# Altium PCB AT32.PcbDoc (part 4 of 9)
Units mm, origin at the board's own origin, x right, y up, seen from the top; angles counter-clockwise.
Board outline 152.1 x 84.6 mm, 2 copper layers (Top Layer, Bottom Layer); 49 components, 58 nets, 223 pads, 0 vias.
Unrouted connection lines stored in the file: 3.
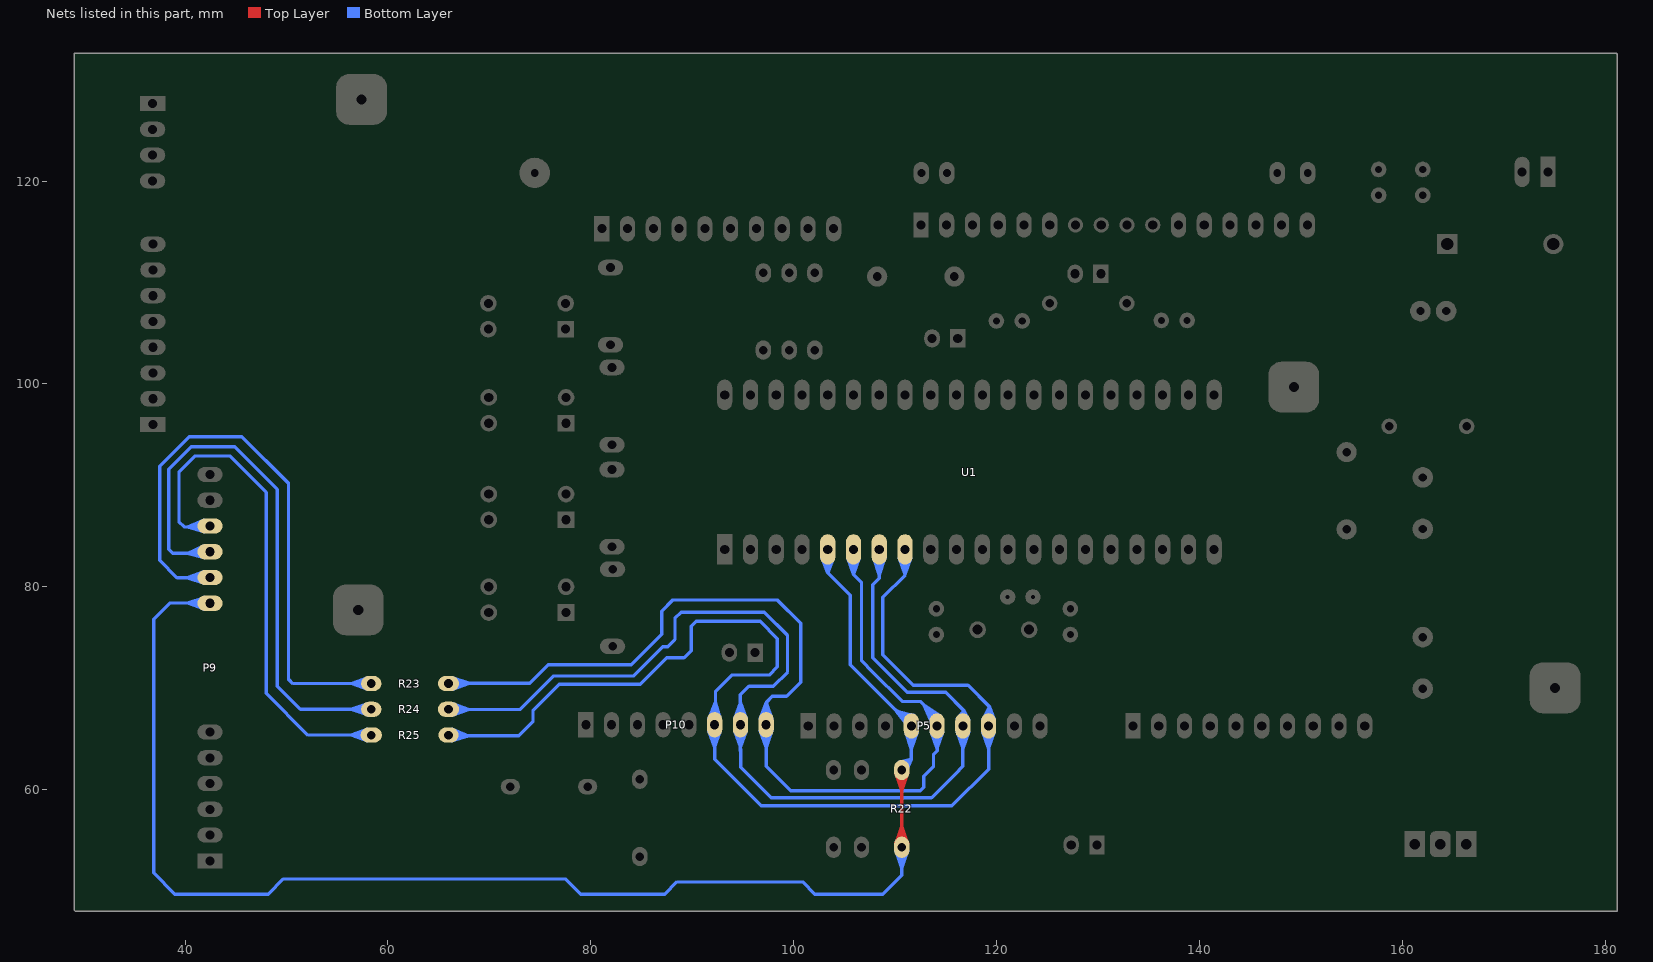
[diagram p4: the nets of this part, all layers, seen from the top]

## Nets (pads, with @x,y where several pads share a name; then routed paths per layer and width w, separated by ;. In a path a pad name is that pad's centre, name@x,y a point inside that pad or via, vN(x,y) a via of type N, cw(c..) or ccw(c..) an arc to the next point about the centre after c; other vN are vias at no path point) (continued)
NetP5_5: P5.5 P9.11 R22.1 R22.2 U1.5 | length 627
  Top Layer w0.33: R22.1@110.246,55.032 ccw(c109.248,56.03) 110.66,56.03 ccw(c112.072,56.03) R22.1@111.074,55.032 ; R22.2@110.246,61.274 cw(c109.248,60.276) 110.66,60.276 cw(c112.072,60.276) R22.2@111.074,61.274 ; R22.1@110.66,54.26 R22.1@110.66,54.318 R22.2@110.66,61.938 ; R22.1@110.083,54.716 110.66,56.358 ; R22.1@110.083,54.716 110.66,56.358 ; R22.1@110.083,54.716 110.66,56.358 ; R22.1@110.083,54.716 110.66,56.358 ; R22.1@110.083,54.716 110.66,56.358 ; R22.1@110.083,54.716 110.66,56.358 ; R22.1@110.083,54.716 110.66,56.358 ; R22.2@110.083,61.59 110.66,59.948 ; R22.2@110.083,61.59 110.66,59.948 ; R22.2@110.083,61.59 110.66,59.948 ; R22.2@110.083,61.59 110.66,59.948 ; R22.2@110.083,61.59 110.66,59.948 ; R22.2@110.083,61.59 110.66,59.948 ; R22.2@110.083,61.59 110.66,59.948 ; R22.1@110.406,54.637 110.66,56.358 ; R22.1@110.406,54.637 110.66,56.358 ; R22.1@110.406,54.637 110.66,56.358 ; R22.1@110.406,54.637 110.66,56.358 ; R22.1@110.406,54.637 110.66,56.358 ; R22.1@110.406,54.637 110.66,56.358 ; R22.1@110.406,54.637 110.66,56.358 ; R22.2@110.406,61.669 110.66,59.948 ; R22.2@110.406,61.669 110.66,59.948 ; R22.2@110.406,61.669 110.66,59.948 ; R22.2@110.406,61.669 110.66,59.948 ; R22.2@110.406,61.669 110.66,59.948 ; R22.2@110.406,61.669 110.66,59.948 ; R22.2@110.406,61.669 110.66,59.948 ; R22.1@110.66,54.618 110.66,56.358 ; R22.1@110.66,54.618 110.66,56.358 ; R22.1@110.66,54.618 110.66,56.358 ; R22.1@110.66,54.618 110.66,56.358 ; R22.1@110.66,54.618 110.66,56.358 ; R22.1@110.66,54.618 110.66,56.358 ; R22.1@110.66,54.618 110.66,56.358 ; 110.66,56.358 R22.1@111.237,54.716 ; 110.66,56.358 R22.1@110.914,54.637 ; 110.66,56.358 R22.1@111.237,54.716 ; 110.66,56.358 R22.1@110.914,54.637 ; 110.66,56.358 R22.1@111.237,54.716 ; 110.66,56.358 R22.1@110.914,54.637 ; 110.66,56.358 R22.1@111.237,54.716 ; 110.66,56.358 R22.1@110.914,54.637 ; 110.66,56.358 R22.1@111.237,54.716 ; 110.66,56.358 R22.1@110.914,54.637 ; 110.66,56.358 R22.1@111.237,54.716 ; 110.66,56.358 R22.1@110.914,54.637 ; 110.66,56.358 R22.1@111.237,54.716 ; 110.66,56.358 R22.1@110.914,54.637 ; 110.66,59.948 R22.2@111.237,61.59 ; 110.66,59.948 R22.2@110.914,61.669 ; 110.66,59.948 R22.2@110.66,61.688 ; 110.66,59.948 R22.2@111.237,61.59 ; 110.66,59.948 R22.2@110.914,61.669 ; 110.66,59.948 R22.2@110.66,61.688 ; 110.66,59.948 R22.2@111.237,61.59 ; 110.66,59.948 R22.2@110.914,61.669 ; 110.66,59.948 R22.2@110.66,61.688 ; 110.66,59.948 R22.2@111.237,61.59 ; 110.66,59.948 R22.2@110.914,61.669 ; 110.66,59.948 R22.2@110.66,61.688 ; 110.66,59.948 R22.2@111.237,61.59 ; 110.66,59.948 R22.2@110.914,61.669 ; 110.66,59.948 R22.2@110.66,61.688 ; 110.66,59.948 R22.2@111.237,61.59 ; 110.66,59.948 R22.2@110.914,61.669 ; 110.66,59.948 R22.2@110.66,61.688 ; 110.66,59.948 R22.2@111.237,61.59 ; 110.66,59.948 R22.2@110.914,61.669 ; 110.66,59.948 R22.2@110.66,61.688
  Bottom Layer w0.33: 40.499,78.4 cw(c40.499,76.919) P9.11@41.546,77.966 ; 40.596,78.4 ccw(c40.596,79.744) P9.11@41.546,78.794 ; P9.11@42.5,78.4 38.5,78.4 36.9,76.8 36.9,51.8 39,49.7 48.2,49.7 49.7,51.2 77.5,51.2 79,49.7 87.3,49.7 88.5,50.9 100.9,50.9 102.1,49.7 108.8,49.7 110.66,51.56 R22.1@110.66,54.318 ; U1.5@102.952,82.523 cw(c101.954,81.525) 103.366,81.525 cw(c104.778,81.525) U1.5@103.78,82.523 ; U1.5@103.366,83.687 103.366,81.399 ; 109.754,68.138 ccw(c111.606,69.99) P5.5@111.606,67.371 ; R22.1@110.246,53.604 cw(c109.248,52.606) 110.66,52.606 cw(c112.072,52.606) R22.1@111.074,53.604 ; 110.317,67.575 ccw(c111.606,68.864) P5.5@111.606,67.041 ; R22.2@110.6,62 111.606,63.006 ; R22.2@110.78,62.76 ccw(c110.967,63.645) 111.606,63.006 ; 110.88,67.012 ccw(c111.606,67.737) P5.5@111.606,66.711 ; P5.5@111.192,65.372 cw(c110.194,64.374) 111.606,64.374 cw(c113.018,64.374) P5.5@112.02,65.372 ; R22.2@111.245,62.188 cw(c112.348,62.188) 111.568,62.968 ; 40.22,78.4 P9.11@41.855,77.804 ; 40.22,78.4 P9.11@41.868,78.958 ; 40.22,78.4 P9.11@41.938,78.126 ; 40.22,78.4 P9.11@41.944,78.635 ; 40.22,78.4 P9.11@41.96,78.38 ; 40.22,78.4 P9.11@41.855,77.804 ; 40.22,78.4 P9.11@41.868,78.958 ; 40.22,78.4 P9.11@41.938,78.126 ; 40.22,78.4 P9.11@41.944,78.635 ; 40.22,78.4 P9.11@41.96,78.38 ; 40.22,78.4 P9.11@41.855,77.804 ; 40.22,78.4 P9.11@41.868,78.958 ; 40.22,78.4 P9.11@41.938,78.126 ; 40.22,78.4 P9.11@41.944,78.635 ; 40.22,78.4 P9.11@41.96,78.38 ; 40.22,78.4 P9.11@41.855,77.804 ; 40.22,78.4 P9.11@41.868,78.958 ; 40.22,78.4 P9.11@41.938,78.126 ; 40.22,78.4 P9.11@41.944,78.635 ; 40.22,78.4 P9.11@41.96,78.38 ; 40.22,78.4 P9.11@41.855,77.804 ; 40.22,78.4 P9.11@41.868,78.958 ; 40.22,78.4 P9.11@41.938,78.126 ; 40.22,78.4 P9.11@41.944,78.635 ; 40.22,78.4 P9.11@41.96,78.38 ; 40.22,78.4 P9.11@41.855,77.804 ; 40.22,78.4 P9.11@41.868,78.958 ; 40.22,78.4 P9.11@41.938,78.126 ; 40.22,78.4 P9.11@41.944,78.635 ; 40.22,78.4 P9.11@41.96,78.38 ; 40.22,78.4 P9.11@41.855,77.804 ; 40.22,78.4 P9.11@41.868,78.958 ; 40.22,78.4 P9.11@41.938,78.126 ; 40.22,78.4 P9.11@41.944,78.635 ; 40.22,78.4 P9.11@41.96,78.38 ; U1.5@102.792,82.826 103.366,81.399 ; U1.5@102.792,82.826 103.366,81.399 ; U1.5@102.792,82.826 103.366,81.399 ; U1.5@102.792,82.826 103.366,81.399 ; U1.5@102.792,82.826 103.366,81.399 ; U1.5@102.792,82.826 103.366,81.399 ; U1.5@102.792,82.826 103.366,81.399 ; U1.5@103.112,82.916 103.366,81.399 ; U1.5@103.112,82.916 103.366,81.399 ; U1.5@103.112,82.916 103.366,81.399 ; U1.5@103.112,82.916 103.366,81.399 ; U1.5@103.112,82.916 103.366,81.399 ; U1.5@103.112,82.916 103.366,81.399 ; U1.5@103.112,82.916 103.366,81.399 ; 103.366,81.399 105.6,79.165 105.6,72.3 107.692,70.208 107.692,70.2 P5.5@111.606,66.286 111.606,63.006 ; 103.366,81.399 U1.5@103.94,82.826 ; 103.366,81.399 U1.5@103.62,82.916 ; 103.366,81.399 U1.5@103.366,82.937 ; 103.366,81.399 U1.5@103.94,82.826 ; 103.366,81.399 U1.5@103.62,82.916 ; 103.366,81.399 U1.5@103.366,82.937 ; 103.366,81.399 U1.5@103.94,82.826 ; 103.366,81.399 U1.5@103.62,82.916 ; 103.366,81.399 U1.5@103.366,82.937 ; 103.366,81.399 U1.5@103.94,82.826 ; 103.366,81.399 U1.5@103.62,82.916 ; 103.366,81.399 U1.5@103.366,82.937 ; 103.366,81.399 U1.5@103.94,82.826 ; 103.366,81.399 U1.5@103.62,82.916 ; 103.366,81.399 U1.5@103.366,82.937 ; 103.366,81.399 U1.5@103.94,82.826 ; 103.366,81.399 U1.5@103.62,82.916 ; 103.366,81.399 U1.5@103.366,82.937 ; 103.366,81.399 U1.5@103.94,82.826 ; 103.366,81.399 U1.5@103.62,82.916 ; 103.366,81.399 U1.5@103.366,82.937 ; R22.1@110.083,53.92 110.66,52.278 ; R22.1@110.083,53.92 110.66,52.278 ; R22.1@110.083,53.92 110.66,52.278 ; R22.1@110.083,53.92 110.66,52.278 ; R22.1@110.083,53.92 110.66,52.278 ; R22.1@110.083,53.92 110.66,52.278 ; R22.1@110.083,53.92 110.66,52.278 ; 110.156,67.736 P5.5@111.207,66.358 ; 110.156,67.736 P5.5@111.839,67.322 ; 110.156,67.736 P5.5@111.451,66.584 ; 110.156,67.736 P5.5@111.73,67.009 ; 110.156,67.736 P5.5@111.606,66.786 ; 110.156,67.736 P5.5@111.207,66.358 ; 110.156,67.736 P5.5@111.839,67.322 ; 110.156,67.736 P5.5@111.451,66.584 ; 110.156,67.736 P5.5@111.73,67.009 ; 110.156,67.736 P5.5@111.606,66.786 ; 110.156,67.736 P5.5@111.207,66.358 ; 110.156,67.736 P5.5@111.839,67.322 ; 110.156,67.736 P5.5@111.451,66.584 ; 110.156,67.736 P5.5@111.73,67.009 ; 110.156,67.736 P5.5@111.606,66.786 ; 110.156,67.736 P5.5@111.207,66.358 ; 110.156,67.736 P5.5@111.839,67.322 ; 110.156,67.736 P5.5@111.451,66.584 ; 110.156,67.736 P5.5@111.73,67.009 ; 110.156,67.736 P5.5@111.606,66.786 ; 110.156,67.736 P5.5@111.207,66.358 ; 110.156,67.736 P5.5@111.839,67.322 ; 110.156,67.736 P5.5@111.451,66.584 ; 110.156,67.736 P5.5@111.73,67.009 ; 110.156,67.736 P5.5@111.606,66.786 ; 110.156,67.736 P5.5@111.207,66.358 ; 110.156,67.736 P5.5@111.839,67.322 ; 110.156,67.736 P5.5@111.451,66.584 ; 110.156,67.736 P5.5@111.73,67.009 ; 110.156,67.736 P5.5@111.606,66.786 ; 110.156,67.736 P5.5@111.207,66.358 ; 110.156,67.736 P5.5@111.839,67.322 ; 110.156,67.736 P5.5@111.451,66.584 ; 110.156,67.736 P5.5@111.73,67.009 ; 110.156,67.736 P5.5@111.606,66.786 ; R22.2@110.391,62.708 111.606,63.006 ; R22.2@110.391,62.708 111.606,63.006 ; R22.2@110.391,62.708 111.606,63.006 ; R22.2@110.391,62.708 111.606,63.006 ; R22.2@110.391,62.708 111.606,63.006 ; R22.2@110.391,62.708 111.606,63.006 ; R22.2@110.391,62.708 111.606,63.006 ; R22.1@110.406,53.999 110.66,52.278 ; R22.1@110.406,53.999 110.66,52.278 ; R22.1@110.406,53.999 110.66,52.278 ; R22.1@110.406,53.999 110.66,52.278 ; R22.1@110.406,53.999 110.66,52.278 ; R22.1@110.406,53.999 110.66,52.278 ; R22.1@110.406,53.999 110.66,52.278 ; R22.2@110.514,62.397 111.606,63.006 ; R22.2@110.514,62.397 111.606,63.006 ; R22.2@110.514,62.397 111.606,63.006 ; R22.2@110.514,62.397 111.606,63.006 ; R22.2@110.514,62.397 111.606,63.006 ; R22.2@110.514,62.397 111.606,63.006 ; R22.2@110.514,62.397 111.606,63.006 ; 110.66,52.278 R22.1@111.237,53.92 ; 110.66,52.278 R22.1@110.914,53.999 ; 110.66,52.278 R22.1@110.66,54.018 ; 110.66,52.278 R22.1@111.237,53.92 ; 110.66,52.278 R22.1@110.914,53.999 ; 110.66,52.278 R22.1@110.66,54.018 ; 110.66,52.278 R22.1@111.237,53.92 ; 110.66,52.278 R22.1@110.914,53.999 ; 110.66,52.278 R22.1@110.66,54.018 ; 110.66,52.278 R22.1@111.237,53.92 ; 110.66,52.278 R22.1@110.914,53.999 ; 110.66,52.278 R22.1@110.66,54.018 ; 110.66,52.278 R22.1@111.237,53.92 ; 110.66,52.278 R22.1@110.914,53.999 ; 110.66,52.278 R22.1@110.66,54.018 ; 110.66,52.278 R22.1@111.237,53.92 ; 110.66,52.278 R22.1@110.914,53.999 ; 110.66,52.278 R22.1@110.66,54.018 ; 110.66,52.278 R22.1@111.237,53.92 ; 110.66,52.278 R22.1@110.914,53.999 ; 110.66,52.278 R22.1@110.66,54.018 ; R22.2@110.66,62.188 111.606,63.006 ; R22.2@110.66,62.188 111.606,63.006 ; R22.2@110.66,62.188 111.606,63.006 ; R22.2@110.66,62.188 111.606,63.006 ; R22.2@110.66,62.188 111.606,63.006 ; R22.2@110.66,62.188 111.606,63.006 ; R22.2@110.66,62.188 111.606,63.006 ; R22.2@110.846,62.013 111.606,63.006 ; R22.2@110.846,62.013 111.606,63.006 ; R22.2@110.846,62.013 111.606,63.006 ; R22.2@110.846,62.013 111.606,63.006 ; R22.2@110.846,62.013 111.606,63.006 ; R22.2@110.846,62.013 111.606,63.006 ; R22.2@110.846,62.013 111.606,63.006 ; P5.5@111.029,65.688 111.606,64.046 ; P5.5@111.029,65.688 111.606,64.046 ; P5.5@111.029,65.688 111.606,64.046 ; P5.5@111.029,65.688 111.606,64.046 ; P5.5@111.029,65.688 111.606,64.046 ; P5.5@111.029,65.688 111.606,64.046 ; P5.5@111.029,65.688 111.606,64.046 ; R22.2@111.135,61.847 111.606,63.006 ; R22.2@111.135,61.847 111.606,63.006 ; R22.2@111.135,61.847 111.606,63.006 ; R22.2@111.135,61.847 111.606,63.006 ; R22.2@111.135,61.847 111.606,63.006 ; R22.2@111.135,61.847 111.606,63.006 ; R22.2@111.135,61.847 111.606,63.006 ; P5.5@111.352,65.767 111.606,64.046 ; P5.5@111.352,65.767 111.606,64.046 ; P5.5@111.352,65.767 111.606,64.046 ; P5.5@111.352,65.767 111.606,64.046 ; P5.5@111.352,65.767 111.606,64.046 ; P5.5@111.352,65.767 111.606,64.046 ; P5.5@111.352,65.767 111.606,64.046 ; 111.606,64.046 P5.5@112.183,65.688 ; 111.606,64.046 P5.5@111.86,65.767 ; 111.606,64.046 P5.5@111.606,65.786 ; 111.606,64.046 P5.5@112.183,65.688 ; 111.606,64.046 P5.5@111.86,65.767 ; 111.606,64.046 P5.5@111.606,65.786 ; 111.606,64.046 P5.5@112.183,65.688 ; 111.606,64.046 P5.5@111.86,65.767 ; 111.606,64.046 P5.5@111.606,65.786 ; 111.606,64.046 P5.5@112.183,65.688 ; 111.606,64.046 P5.5@111.86,65.767 ; 111.606,64.046 P5.5@111.606,65.786 ; 111.606,64.046 P5.5@112.183,65.688 ; 111.606,64.046 P5.5@111.86,65.767 ; 111.606,64.046 P5.5@111.606,65.786 ; 111.606,64.046 P5.5@112.183,65.688 ; 111.606,64.046 P5.5@111.86,65.767 ; 111.606,64.046 P5.5@111.606,65.786 ; 111.606,64.046 P5.5@112.183,65.688 ; 111.606,64.046 P5.5@111.86,65.767 ; 111.606,64.046 P5.5@111.606,65.786
NetP5_6: P5.6 P9.12 P10.8 R23.1 R23.2 U1.6 | length 673.5
  Bottom Layer w0.33: 40.499,80.9 ccw(c40.499,82.381) P9.12@41.546,81.334 ; 40.596,80.9 cw(c40.596,79.556) P9.12@41.546,80.506 ; P9.12@42.4,80.9 39.2,80.9 37.5,82.6 37.5,91.9 40.4,94.8 45.6,94.8 50.2,90.2 50.2,70.9 50.636,70.464 R23.2@58.358,70.464 ; R23.2@57.694,70.05 ccw(c56.696,69.052) 56.696,70.464 ccw(c56.696,71.876) R23.2@57.694,70.878 ; R23.1@66,70.5 74,70.5 75.8,72.3 84,72.3 87,75.3 87,77.6 88.1,78.7 98.4,78.7 100.7,76.4 100.7,70.6 99.3,69.2 97.9,69.2 97.295,68.595 ; R23.1@66.692,70.05 cw(c67.777,68.965) 67.777,70.5 ; R23.1@66.692,70.878 ccw(c67.603,71.789) 67.603,70.5 ; P10.8@96.881,65.492 cw(c95.883,64.494) 97.295,64.494 cw(c98.707,64.494) P10.8@97.709,65.492 ; P10.8@96.881,67.32 ccw(c95.883,68.318) 97.295,68.318 ccw(c98.707,68.318) P10.8@97.709,67.32 ; P10.8@97.295,67.006 P10.8@97.295,66.406 ; U1.6@105.492,82.523 cw(c104.494,81.525) 105.906,81.525 cw(c107.318,81.525) U1.6@106.32,82.523 ; U1.6@105.906,83.687 105.906,81.184 106.7,80.39 106.7,72.7 107.8,71.6 110.7,68.7 112.5,68.7 P5.6@114.2,67 ; 112.958,68.242 cw(c111.502,66.786) P5.6@113.561,66.786 ; 113.521,67.679 cw(c112.629,66.786) P5.6@113.891,66.786 ; 113.605,67.595 ccw(c114.146,68.137) P5.6@114.146,67.371 ; P5.6@113.732,65.372 cw(c112.734,64.374) 114.146,64.374 cw(c115.558,64.374) P5.6@114.56,65.372 ; P5.6@114.146,66.286 114.146,63.846 113.8,63.5 113.8,62.3 112.822,61.322 112.822,60.223 112.5,59.9 99.7,59.9 97.3,62.3 97.3,63.6 97.295,63.605 P10.8@97.295,66.406 ; 40.22,80.9 P9.12@41.868,80.342 ; 40.22,80.9 P9.12@41.855,81.496 ; 40.22,80.9 P9.12@41.944,80.665 ; 40.22,80.9 P9.12@41.938,81.174 ; 40.22,80.9 P9.12@41.96,80.92 ; 40.22,80.9 P9.12@41.868,80.342 ; 40.22,80.9 P9.12@41.855,81.496 ; 40.22,80.9 P9.12@41.944,80.665 ; 40.22,80.9 P9.12@41.938,81.174 ; 40.22,80.9 P9.12@41.96,80.92 ; 40.22,80.9 P9.12@41.868,80.342 ; 40.22,80.9 P9.12@41.855,81.496 ; 40.22,80.9 P9.12@41.944,80.665 ; 40.22,80.9 P9.12@41.938,81.174 ; 40.22,80.9 P9.12@41.96,80.92 ; 40.22,80.9 P9.12@41.868,80.342 ; 40.22,80.9 P9.12@41.855,81.496 ; 40.22,80.9 P9.12@41.944,80.665 ; 40.22,80.9 P9.12@41.938,81.174 ; 40.22,80.9 P9.12@41.96,80.92 ; 40.22,80.9 P9.12@41.868,80.342 ; 40.22,80.9 P9.12@41.855,81.496 ; 40.22,80.9 P9.12@41.944,80.665 ; 40.22,80.9 P9.12@41.938,81.174 ; 40.22,80.9 P9.12@41.96,80.92 ; 40.22,80.9 P9.12@41.868,80.342 ; 40.22,80.9 P9.12@41.855,81.496 ; 40.22,80.9 P9.12@41.944,80.665 ; 40.22,80.9 P9.12@41.938,81.174 ; 40.22,80.9 P9.12@41.96,80.92 ; 40.22,80.9 P9.12@41.868,80.342 ; 40.22,80.9 P9.12@41.855,81.496 ; 40.22,80.9 P9.12@41.944,80.665 ; 40.22,80.9 P9.12@41.938,81.174 ; 40.22,80.9 P9.12@41.96,80.92 ; 56.368,70.464 R23.2@58.01,69.887 ; 56.368,70.464 R23.2@58.01,71.041 ; 56.368,70.464 R23.2@58.089,70.21 ; 56.368,70.464 R23.2@58.089,70.718 ; 56.368,70.464 R23.2@58.108,70.464 ; 56.368,70.464 R23.2@58.01,69.887 ; 56.368,70.464 R23.2@58.01,71.041 ; 56.368,70.464 R23.2@58.089,70.21 ; 56.368,70.464 R23.2@58.089,70.718 ; 56.368,70.464 R23.2@58.108,70.464 ; 56.368,70.464 R23.2@58.01,69.887 ; 56.368,70.464 R23.2@58.01,71.041 ; 56.368,70.464 R23.2@58.089,70.21 ; 56.368,70.464 R23.2@58.089,70.718 ; 56.368,70.464 R23.2@58.108,70.464 ; 56.368,70.464 R23.2@58.01,69.887 ; 56.368,70.464 R23.2@58.01,71.041 ; 56.368,70.464 R23.2@58.089,70.21 ; 56.368,70.464 R23.2@58.089,70.718 ; 56.368,70.464 R23.2@58.108,70.464 ; 56.368,70.464 R23.2@58.01,69.887 ; 56.368,70.464 R23.2@58.01,71.041 ; 56.368,70.464 R23.2@58.089,70.21 ; 56.368,70.464 R23.2@58.089,70.718 ; 56.368,70.464 R23.2@58.108,70.464 ; 56.368,70.464 R23.2@58.01,69.887 ; 56.368,70.464 R23.2@58.01,71.041 ; 56.368,70.464 R23.2@58.089,70.21 ; 56.368,70.464 R23.2@58.089,70.718 ; 56.368,70.464 R23.2@58.108,70.464 ; 56.368,70.464 R23.2@58.01,69.887 ; 56.368,70.464 R23.2@58.01,71.041 ; 56.368,70.464 R23.2@58.089,70.21 ; 56.368,70.464 R23.2@58.089,70.718 ; 56.368,70.464 R23.2@58.108,70.464 ; R23.1@66.278,70.464 68.018,70.5 ; R23.1@66.278,70.464 68.018,70.5 ; R23.1@66.278,70.464 68.018,70.5 ; R23.1@66.278,70.464 68.018,70.5 ; R23.1@66.278,70.464 68.018,70.5 ; R23.1@66.278,70.464 68.018,70.5 ; R23.1@66.278,70.464 68.018,70.5 ; R23.1@66.291,70.719 68.018,70.5 ; R23.1@66.291,70.719 68.018,70.5 ; R23.1@66.291,70.719 68.018,70.5 ; R23.1@66.291,70.719 68.018,70.5 ; R23.1@66.291,70.719 68.018,70.5 ; R23.1@66.291,70.719 68.018,70.5 ; R23.1@66.291,70.719 68.018,70.5 ; R23.1@66.302,70.21 68.018,70.5 ; R23.1@66.302,70.21 68.018,70.5 ; R23.1@66.302,70.21 68.018,70.5 ; R23.1@66.302,70.21 68.018,70.5 ; R23.1@66.302,70.21 68.018,70.5 ; R23.1@66.302,70.21 68.018,70.5 ; R23.1@66.302,70.21 68.018,70.5 ; R23.1@66.364,71.043 68.018,70.5 ; R23.1@66.364,71.043 68.018,70.5 ; R23.1@66.364,71.043 68.018,70.5 ; R23.1@66.364,71.043 68.018,70.5 ; R23.1@66.364,71.043 68.018,70.5 ; R23.1@66.364,71.043 68.018,70.5 ; R23.1@66.364,71.043 68.018,70.5 ; R23.1@66.388,69.889 68.018,70.5 ; R23.1@66.388,69.889 68.018,70.5 ; R23.1@66.388,69.889 68.018,70.5 ; R23.1@66.388,69.889 68.018,70.5 ; R23.1@66.388,69.889 68.018,70.5 ; R23.1@66.388,69.889 68.018,70.5 ; R23.1@66.388,69.889 68.018,70.5 ; P10.8@96.718,65.808 97.295,64.166 ; P10.8@96.718,65.808 97.295,64.166 ; P10.8@96.718,65.808 97.295,64.166 ; P10.8@96.718,65.808 97.295,64.166 ; P10.8@96.718,65.808 97.295,64.166 ; P10.8@96.718,65.808 97.295,64.166 ; P10.8@96.718,65.808 97.295,64.166 ; P10.8@96.719,67.007 97.295,68.595 ; P10.8@96.719,67.007 97.295,68.595 ; P10.8@96.719,67.007 97.295,68.595 ; P10.8@96.719,67.007 97.295,68.595 ; P10.8@96.719,67.007 97.295,68.595 ; P10.8@96.719,67.007 97.295,68.595 ; P10.8@96.719,67.007 97.295,68.595 ; P10.8@97.041,65.887 97.295,64.166 ; P10.8@97.041,65.887 97.295,64.166 ; P10.8@97.041,65.887 97.295,64.166 ; P10.8@97.041,65.887 97.295,64.166 ; P10.8@97.041,65.887 97.295,64.166 ; P10.8@97.041,65.887 97.295,64.166 ; P10.8@97.041,65.887 97.295,64.166 ; P10.8@97.041,66.925 97.295,68.595 ; P10.8@97.041,66.925 97.295,68.595 ; P10.8@97.041,66.925 97.295,68.595 ; P10.8@97.041,66.925 97.295,68.595 ; P10.8@97.041,66.925 97.295,68.595 ; P10.8@97.041,66.925 97.295,68.595 ; P10.8@97.041,66.925 97.295,68.595 ; 97.295,64.166 P10.8@97.872,65.808 ; 97.295,64.166 P10.8@97.549,65.887 ; 97.295,64.166 P10.8@97.295,65.906 ; 97.295,64.166 P10.8@97.872,65.808 ; 97.295,64.166 P10.8@97.549,65.887 ; 97.295,64.166 P10.8@97.295,65.906 ; 97.295,64.166 P10.8@97.872,65.808 ; 97.295,64.166 P10.8@97.549,65.887 ; 97.295,64.166 P10.8@97.295,65.906 ; 97.295,64.166 P10.8@97.872,65.808 ; 97.295,64.166 P10.8@97.549,65.887 ; 97.295,64.166 P10.8@97.295,65.906 ; 97.295,64.166 P10.8@97.872,65.808 ; 97.295,64.166 P10.8@97.549,65.887 ; 97.295,64.166 P10.8@97.295,65.906 ; 97.295,64.166 P10.8@97.872,65.808 ; 97.295,64.166 P10.8@97.549,65.887 ; 97.295,64.166 P10.8@97.295,65.906 ; 97.295,64.166 P10.8@97.872,65.808 ; 97.295,64.166 P10.8@97.549,65.887 ; 97.295,64.166 P10.8@97.295,65.906 ; P10.8@97.295,66.406 97.295,68.595 ; P10.8@97.295,66.906 97.295,68.595 ; P10.8@97.295,66.906 97.295,68.595 ; P10.8@97.295,66.906 97.295,68.595 ; P10.8@97.295,66.906 97.295,68.595 ; P10.8@97.295,66.906 97.295,68.595 ; P10.8@97.295,66.906 97.295,68.595 ; P10.8@97.295,66.906 97.295,68.595 ; 97.295,68.595 P10.8@97.871,67.007 ; 97.295,68.595 P10.8@97.549,66.925 ; 97.295,68.595 P10.8@97.871,67.007 ; 97.295,68.595 P10.8@97.549,66.925 ; 97.295,68.595 P10.8@97.871,67.007 ; 97.295,68.595 P10.8@97.549,66.925 ; 97.295,68.595 P10.8@97.871,67.007 ; 97.295,68.595 P10.8@97.549,66.925 ; 97.295,68.595 P10.8@97.871,67.007 ; 97.295,68.595 P10.8@97.549,66.925 ; 97.295,68.595 P10.8@97.871,67.007 ; 97.295,68.595 P10.8@97.549,66.925 ; 97.295,68.595 P10.8@97.871,67.007 ; 97.295,68.595 P10.8@97.549,66.925 ; U1.6@105.329,82.839 105.906,81.197 ; U1.6@105.329,82.839 105.906,81.197 ; U1.6@105.329,82.839 105.906,81.197 ; U1.6@105.329,82.839 105.906,81.197 ; U1.6@105.329,82.839 105.906,81.197 ; U1.6@105.329,82.839 105.906,81.197 ; U1.6@105.329,82.839 105.906,81.197 ; U1.6@105.652,82.918 105.906,81.197 ; U1.6@105.652,82.918 105.906,81.197 ; U1.6@105.652,82.918 105.906,81.197 ; U1.6@105.652,82.918 105.906,81.197 ; U1.6@105.652,82.918 105.906,81.197 ; U1.6@105.652,82.918 105.906,81.197 ; U1.6@105.652,82.918 105.906,81.197 ; 105.906,81.197 U1.6@106.483,82.839 ; 105.906,81.197 U1.6@106.16,82.918 ; 105.906,81.197 U1.6@105.906,82.937 ; 105.906,81.197 U1.6@106.483,82.839 ; 105.906,81.197 U1.6@106.16,82.918 ; 105.906,81.197 U1.6@105.906,82.937 ; 105.906,81.197 U1.6@106.483,82.839 ; 105.906,81.197 U1.6@106.16,82.918 ; 105.906,81.197 U1.6@105.906,82.937 ; 105.906,81.197 U1.6@106.483,82.839 ; 105.906,81.197 U1.6@106.16,82.918 ; 105.906,81.197 U1.6@105.906,82.937 ; 105.906,81.197 U1.6@106.483,82.839 ; 105.906,81.197 U1.6@106.16,82.918 ; 105.906,81.197 U1.6@105.906,82.937 ; 105.906,81.197 U1.6@106.483,82.839 ; 105.906,81.197 U1.6@106.16,82.918 ; 105.906,81.197 U1.6@105.906,82.937 ; 105.906,81.197 U1.6@106.483,82.839 ; 105.906,81.197 U1.6@106.16,82.918 ; 105.906,81.197 U1.6@105.906,82.937 ; 112.869,68.331 P5.6@113.646,66.483 ; 112.869,68.331 P5.6@114.538,67.221 ; 112.869,68.331 P5.6@113.94,66.636 ; 112.869,68.331 P5.6@114.332,66.961 ; 112.869,68.331 P5.6@114.146,66.786 ; 112.869,68.331 P5.6@113.646,66.483 ; 112.869,68.331 P5.6@114.538,67.221 ; 112.869,68.331 P5.6@113.94,66.636 ; 112.869,68.331 P5.6@114.332,66.961 ; 112.869,68.331 P5.6@114.146,66.786 ; 112.869,68.331 P5.6@113.646,66.483 ; 112.869,68.331 P5.6@114.538,67.221 ; 112.869,68.331 P5.6@113.94,66.636 ; 112.869,68.331 P5.6@114.332,66.961 ; 112.869,68.331 P5.6@114.146,66.786 ; 112.869,68.331 P5.6@113.646,66.483 ; 112.869,68.331 P5.6@114.538,67.221 ; 112.869,68.331 P5.6@113.94,66.636 ; 112.869,68.331 P5.6@114.332,66.961 ; 112.869,68.331 P5.6@114.146,66.786 ; 112.869,68.331 P5.6@113.646,66.483 ; 112.869,68.331 P5.6@114.538,67.221 ; 112.869,68.331 P5.6@113.94,66.636 ; 112.869,68.331 P5.6@114.332,66.961 ; 112.869,68.331 P5.6@114.146,66.786 ; 112.869,68.331 P5.6@113.646,66.483 ; 112.869,68.331 P5.6@114.538,67.221 ; 112.869,68.331 P5.6@113.94,66.636 ; 112.869,68.331 P5.6@114.332,66.961 ; 112.869,68.331 P5.6@114.146,66.786 ; 112.872,68.327 P5.6@113.646,66.483 ; 112.872,68.327 P5.6@114.537,67.221 ; 112.872,68.327 P5.6@113.94,66.636 ; 112.872,68.327 P5.6@114.332,66.961 ; 112.872,68.327 P5.6@114.146,66.786 ; P5.6@113.569,65.688 114.146,64.046 ; P5.6@113.569,65.688 114.146,64.046 ; P5.6@113.569,65.688 114.146,64.046 ; P5.6@113.569,65.688 114.146,64.046 ; P5.6@113.569,65.688 114.146,64.046 ; P5.6@113.569,65.688 114.146,64.046 ; P5.6@113.569,65.688 114.146,64.046 ; P5.6@113.892,65.767 114.146,64.046 ; P5.6@113.892,65.767 114.146,64.046 ; P5.6@113.892,65.767 114.146,64.046 ; P5.6@113.892,65.767 114.146,64.046 ; P5.6@113.892,65.767 114.146,64.046 ; P5.6@113.892,65.767 114.146,64.046 ; P5.6@113.892,65.767 114.146,64.046 ; 114.146,64.046 P5.6@114.723,65.688 ; 114.146,64.046 P5.6@114.4,65.767 ; 114.146,64.046 P5.6@114.146,65.786 ; 114.146,64.046 P5.6@114.723,65.688 ; 114.146,64.046 P5.6@114.4,65.767 ; 114.146,64.046 P5.6@114.146,65.786 ; 114.146,64.046 P5.6@114.723,65.688 ; 114.146,64.046 P5.6@114.4,65.767 ; 114.146,64.046 P5.6@114.146,65.786 ; 114.146,64.046 P5.6@114.723,65.688 ; 114.146,64.046 P5.6@114.4,65.767 ; 114.146,64.046 P5.6@114.146,65.786 ; 114.146,64.046 P5.6@114.723,65.688 ; 114.146,64.046 P5.6@114.4,65.767 ; 114.146,64.046 P5.6@114.146,65.786 ; 114.146,64.046 P5.6@114.723,65.688 ; 114.146,64.046 P5.6@114.4,65.767 ; 114.146,64.046 P5.6@114.146,65.786 ; 114.146,64.046 P5.6@114.723,65.688 ; 114.146,64.046 P5.6@114.4,65.767 ; 114.146,64.046 P5.6@114.146,65.786
NetP5_7: P5.7 P9.13 P10.7 R24.1 R24.2 U1.7 | length 643.6
  Bottom Layer w0.33: 40.161,83.3 ccw(c40.161,85.259) P9.13@41.546,83.874 ; 40.934,83.3 cw(c40.934,82.434) P9.13@41.546,83.046 ; 40.958,83.3 ccw(c40.958,84.462) P9.13@41.78,83.64 ; P9.13@41.918,83.712 40.222,83.301 ; P9.13@42.4,83.3 38.8,83.3 38.4,83.7 38.4,91.6 40.6,93.8 44.9,93.8 49.1,89.6 49.1,70.2 51.376,67.924 R24.2@58.358,67.924 ; R24.2@57.694,67.51 ccw(c56.696,66.512) 56.696,67.924 ccw(c56.696,69.336) R24.2@57.694,68.338 ; R24.1@66.2,67.9 73,67.9 76.3,71.2 84.2,71.2 87.1,74.1 87.6,74.1 88.3,74.8 88.3,76.9 88.9,77.5 97.1,77.5 99.4,75.2 99.4,71.6 98,70.2 95.6,70.2 94.755,69.355 P10.7@94.755,66.406 ; R24.1@66.692,67.51 cw(c67.632,66.57) 67.632,67.9 ; R24.1@66.692,68.338 ccw(c67.748,69.394) 67.748,67.9 ; P10.7@94.341,65.492 cw(c93.343,64.494) 94.755,64.494 cw(c96.167,64.494) P10.7@95.169,65.492 ; P10.7@94.341,67.32 ccw(c93.343,68.318) 94.755,68.318 ccw(c96.167,68.318) P10.7@95.169,67.32 ; P10.7@94.755,67.006 P10.7@94.755,66.406 ; 94.8,64 94.8,63.8 ; U1.7@108.032,82.523 cw(c107.034,81.525) 108.446,81.525 cw(c109.858,81.525) U1.7@108.86,82.523 ; U1.7@108.446,83.687 108.446,80.833 107.8,80.188 107.8,73 111.2,69.6 115,69.6 116.8,67.8 ; P5.7@116.272,65.372 cw(c115.274,64.374) 116.686,64.374 cw(c118.098,64.374) P5.7@117.1,65.372 ; 116.3,61.9 116.686,62.286 P5.7@116.686,66.286 ; 116.34,61.938 113.602,59.2 97.8,59.2 94.8,62.2 94.8,63.8 ; P5.7@116.478,67.333 ccw(c116.3,67.8) 116.8,67.8 ; P5.7@116.8,66.4 116.8,67.8 ; P5.7@117.063,67.233 cw(c117.542,67.8) 116.8,67.8 ; 40.215,83.3 P9.13@41.915,82.877 ; 40.215,83.3 P9.13@41.81,84.025 ; 40.215,83.3 P9.13@41.965,83.205 ; 40.215,83.3 P9.13@41.918,83.712 ; 40.215,83.3 P9.13@41.96,83.46 ; 40.215,83.3 P9.13@41.915,82.877 ; 40.215,83.3 P9.13@41.81,84.025 ; 40.215,83.3 P9.13@41.965,83.205 ; 40.215,83.3 P9.13@41.918,83.712 ; 40.215,83.3 P9.13@41.96,83.46 ; 40.215,83.3 P9.13@41.915,82.877 ; 40.215,83.3 P9.13@41.81,84.025 ; 40.215,83.3 P9.13@41.965,83.205 ; 40.215,83.3 P9.13@41.918,83.712 ; 40.215,83.3 P9.13@41.96,83.46 ; 40.215,83.3 P9.13@41.915,82.877 ; 40.215,83.3 P9.13@41.81,84.025 ; 40.215,83.3 P9.13@41.965,83.205 ; 40.215,83.3 P9.13@41.918,83.712 ; 40.215,83.3 P9.13@41.96,83.46 ; 40.215,83.3 P9.13@41.915,82.877 ; 40.215,83.3 P9.13@41.81,84.025 ; 40.215,83.3 P9.13@41.965,83.205 ; 40.215,83.3 P9.13@41.918,83.712 ; 40.215,83.3 P9.13@41.96,83.46 ; 40.215,83.3 P9.13@41.915,82.877 ; 40.215,83.3 P9.13@41.81,84.025 ; 40.215,83.3 P9.13@41.965,83.205 ; 40.215,83.3 P9.13@41.918,83.712 ; 40.215,83.3 P9.13@41.96,83.46 ; 40.222,83.301 P9.13@41.915,82.877 ; 40.222,83.301 P9.13@41.81,84.025 ; 40.222,83.301 P9.13@41.965,83.205 ; 40.222,83.301 P9.13@41.96,83.46 ; 56.368,67.924 R24.2@58.01,67.347 ; 56.368,67.924 R24.2@58.01,68.501 ; 56.368,67.924 R24.2@58.089,67.67 ; 56.368,67.924 R24.2@58.089,68.178 ; 56.368,67.924 R24.2@58.108,67.924 ; 56.368,67.924 R24.2@58.01,67.347 ; 56.368,67.924 R24.2@58.01,68.501 ; 56.368,67.924 R24.2@58.089,67.67 ; 56.368,67.924 R24.2@58.089,68.178 ; 56.368,67.924 R24.2@58.108,67.924 ; 56.368,67.924 R24.2@58.01,67.347 ; 56.368,67.924 R24.2@58.01,68.501 ; 56.368,67.924 R24.2@58.089,67.67 ; 56.368,67.924 R24.2@58.089,68.178 ; 56.368,67.924 R24.2@58.108,67.924 ; 56.368,67.924 R24.2@58.01,67.347 ; 56.368,67.924 R24.2@58.01,68.501 ; 56.368,67.924 R24.2@58.089,67.67 ; 56.368,67.924 R24.2@58.089,68.178 ; 56.368,67.924 R24.2@58.108,67.924 ; 56.368,67.924 R24.2@58.01,67.347 ; 56.368,67.924 R24.2@58.01,68.501 ; 56.368,67.924 R24.2@58.089,67.67 ; 56.368,67.924 R24.2@58.089,68.178 ; 56.368,67.924 R24.2@58.108,67.924 ; 56.368,67.924 R24.2@58.01,67.347 ; 56.368,67.924 R24.2@58.01,68.501 ; 56.368,67.924 R24.2@58.089,67.67 ; 56.368,67.924 R24.2@58.089,68.178 ; 56.368,67.924 R24.2@58.108,67.924 ; 56.368,67.924 R24.2@58.01,67.347 ; 56.368,67.924 R24.2@58.01,68.501 ; 56.368,67.924 R24.2@58.089,67.67 ; 56.368,67.924 R24.2@58.089,68.178 ; 56.368,67.924 R24.2@58.108,67.924 ; R24.1@66.278,67.924 68.018,67.9 ; R24.1@66.278,67.924 68.018,67.9 ; R24.1@66.278,67.924 68.018,67.9 ; R24.1@66.278,67.924 68.018,67.9 ; R24.1@66.278,67.924 68.018,67.9 ; R24.1@66.278,67.924 68.018,67.9 ; R24.1@66.278,67.924 68.018,67.9 ; R24.1@66.293,67.669 68.018,67.9 ; R24.1@66.293,67.669 68.018,67.9 ; R24.1@66.293,67.669 68.018,67.9 ; R24.1@66.293,67.669 68.018,67.9 ; R24.1@66.293,67.669 68.018,67.9 ; R24.1@66.293,67.669 68.018,67.9 ; R24.1@66.293,67.669 68.018,67.9 ; R24.1@66.3,68.178 68.018,67.9 ; R24.1@66.3,68.178 68.018,67.9 ; R24.1@66.3,68.178 68.018,67.9 ; R24.1@66.3,68.178 68.018,67.9 ; R24.1@66.3,68.178 68.018,67.9 ; R24.1@66.3,68.178 68.018,67.9 ; R24.1@66.3,68.178 68.018,67.9 ; R24.1@66.368,67.346 68.018,67.9 ; R24.1@66.368,67.346 68.018,67.9 ; R24.1@66.368,67.346 68.018,67.9 ; R24.1@66.368,67.346 68.018,67.9 ; R24.1@66.368,67.346 68.018,67.9 ; R24.1@66.368,67.346 68.018,67.9 ; R24.1@66.368,67.346 68.018,67.9 ; R24.1@66.384,68.499 68.018,67.9 ; R24.1@66.384,68.499 68.018,67.9 ; R24.1@66.384,68.499 68.018,67.9 ; R24.1@66.384,68.499 68.018,67.9 ; R24.1@66.384,68.499 68.018,67.9 ; R24.1@66.384,68.499 68.018,67.9 ; R24.1@66.384,68.499 68.018,67.9 ; P10.7@94.178,65.808 94.755,64.166 ; P10.7@94.178,65.808 94.755,64.166 ; P10.7@94.178,65.808 94.755,64.166 ; P10.7@94.178,65.808 94.755,64.166 ; P10.7@94.178,65.808 94.755,64.166 ; P10.7@94.178,65.808 94.755,64.166 ; P10.7@94.178,65.808 94.755,64.166 ; P10.7@94.178,67.004 94.755,68.646 ; P10.7@94.178,67.004 94.755,68.646 ; P10.7@94.178,67.004 94.755,68.646 ; P10.7@94.178,67.004 94.755,68.646 ; P10.7@94.178,67.004 94.755,68.646 ; P10.7@94.178,67.004 94.755,68.646 ; P10.7@94.178,67.004 94.755,68.646 ; P10.7@94.501,65.887 94.755,64.166 ; P10.7@94.501,65.887 94.755,64.166 ; P10.7@94.501,65.887 94.755,64.166 ; P10.7@94.501,65.887 94.755,64.166 ; P10.7@94.501,65.887 94.755,64.166 ; P10.7@94.501,65.887 94.755,64.166 ; P10.7@94.501,65.887 94.755,64.166 ; P10.7@94.501,66.925 94.755,68.646 ; P10.7@94.501,66.925 94.755,68.646 ; P10.7@94.501,66.925 94.755,68.646 ; P10.7@94.501,66.925 94.755,68.646 ; P10.7@94.501,66.925 94.755,68.646 ; P10.7@94.501,66.925 94.755,68.646 ; P10.7@94.501,66.925 94.755,68.646 ; 94.755,64.166 P10.7@95.332,65.808 ; 94.755,64.166 P10.7@95.009,65.887 ; 94.755,64.166 P10.7@94.755,65.906 ; 94.755,64.166 P10.7@95.332,65.808 ; 94.755,64.166 P10.7@95.009,65.887 ; 94.755,64.166 P10.7@94.755,65.906 ; 94.755,64.166 P10.7@95.332,65.808 ; 94.755,64.166 P10.7@95.009,65.887 ; 94.755,64.166 P10.7@94.755,65.906 ; 94.755,64.166 P10.7@95.332,65.808 ; 94.755,64.166 P10.7@95.009,65.887 ; 94.755,64.166 P10.7@94.755,65.906 ; 94.755,64.166 P10.7@95.332,65.808 ; 94.755,64.166 P10.7@95.009,65.887 ; 94.755,64.166 P10.7@94.755,65.906 ; 94.755,64.166 P10.7@95.332,65.808 ; 94.755,64.166 P10.7@95.009,65.887 ; 94.755,64.166 P10.7@94.755,65.906 ; 94.755,64.166 P10.7@95.332,65.808 ; 94.755,64.166 P10.7@95.009,65.887 ; 94.755,64.166 P10.7@94.755,65.906 ; P10.7@94.755,66.406 94.755,63.845 94.8,63.8 ; P10.7@94.755,66.906 94.755,68.646 ; P10.7@94.755,66.906 94.755,68.646 ; P10.7@94.755,66.906 94.755,68.646 ; P10.7@94.755,66.906 94.755,68.646 ; P10.7@94.755,66.906 94.755,68.646 ; P10.7@94.755,66.906 94.755,68.646 ; P10.7@94.755,66.906 94.755,68.646 ; 94.755,68.646 P10.7@95.332,67.004 ; 94.755,68.646 P10.7@95.009,66.925 ; 94.755,68.646 P10.7@95.332,67.004 ; 94.755,68.646 P10.7@95.009,66.925 ; 94.755,68.646 P10.7@95.332,67.004 ; 94.755,68.646 P10.7@95.009,66.925 ; 94.755,68.646 P10.7@95.332,67.004 ; 94.755,68.646 P10.7@95.009,66.925 ; 94.755,68.646 P10.7@95.332,67.004 ; 94.755,68.646 P10.7@95.009,66.925 ; 94.755,68.646 P10.7@95.332,67.004 ; 94.755,68.646 P10.7@95.009,66.925 ; 94.755,68.646 P10.7@95.332,67.004 ; 94.755,68.646 P10.7@95.009,66.925 ; U1.7@107.869,82.839 108.446,81.197 ; U1.7@107.869,82.839 108.446,81.197 ; U1.7@107.869,82.839 108.446,81.197 ; U1.7@107.869,82.839 108.446,81.197 ; U1.7@107.869,82.839 108.446,81.197 ; U1.7@107.869,82.839 108.446,81.197 ; U1.7@107.869,82.839 108.446,81.197 ; U1.7@108.192,82.918 108.446,81.197 ; U1.7@108.192,82.918 108.446,81.197 ; U1.7@108.192,82.918 108.446,81.197 ; U1.7@108.192,82.918 108.446,81.197 ; U1.7@108.192,82.918 108.446,81.197 ; U1.7@108.192,82.918 108.446,81.197 ; U1.7@108.192,82.918 108.446,81.197 ; 108.446,81.197 U1.7@109.023,82.839 ; 108.446,81.197 U1.7@108.7,82.918 ; 108.446,81.197 U1.7@108.446,82.937 ; 108.446,81.197 U1.7@109.023,82.839 ; 108.446,81.197 U1.7@108.7,82.918 ; 108.446,81.197 U1.7@108.446,82.937 ; 108.446,81.197 U1.7@109.023,82.839 ; 108.446,81.197 U1.7@108.7,82.918 ; 108.446,81.197 U1.7@108.446,82.937 ; 108.446,81.197 U1.7@109.023,82.839 ; 108.446,81.197 U1.7@108.7,82.918 ; 108.446,81.197 U1.7@108.446,82.937 ; 108.446,81.197 U1.7@109.023,82.839 ; 108.446,81.197 U1.7@108.7,82.918 ; 108.446,81.197 U1.7@108.446,82.937 ; 108.446,81.197 U1.7@109.023,82.839 ; 108.446,81.197 U1.7@108.7,82.918 ; 108.446,81.197 U1.7@108.446,82.937 ; 108.446,81.197 U1.7@109.023,82.839 ; 108.446,81.197 U1.7@108.7,82.918 ; 108.446,81.197 U1.7@108.446,82.937 ; P5.7@116.109,65.688 116.686,64.046 ; P5.7@116.109,65.688 116.686,64.046 ; P5.7@116.109,65.688 116.686,64.046 ; P5.7@116.109,65.688 116.686,64.046 ; P5.7@116.109,65.688 116.686,64.046 ; P5.7@116.109,65.688 116.686,64.046 ; P5.7@116.109,65.688 116.686,64.046 ; P5.7@116.148,67.015 116.8,67.8 ; P5.7@116.148,67.015 116.8,67.8 ; P5.7@116.148,67.015 116.8,67.8 ; P5.7@116.148,67.015 116.8,67.8 ; P5.7@116.148,67.015 116.8,67.8 ; P5.7@116.148,67.015 116.8,67.8 ; P5.7@116.148,67.015 116.8,67.8 ; P5.7@116.432,65.767 116.686,64.046 ; P5.7@116.432,65.767 116.686,64.046 ; P5.7@116.432,65.767 116.686,64.046 ; P5.7@116.432,65.767 116.686,64.046 ; P5.7@116.432,65.767 116.686,64.046 ; P5.7@116.432,65.767 116.686,64.046 ; P5.7@116.432,65.767 116.686,64.046 ; P5.7@116.438,66.846 116.8,67.8 ; P5.7@116.438,66.846 116.8,67.8 ; P5.7@116.438,66.846 116.8,67.8 ; P5.7@116.438,66.846 116.8,67.8 ; P5.7@116.438,66.846 116.8,67.8 ; P5.7@116.438,66.846 116.8,67.8 ; P5.7@116.438,66.846 116.8,67.8 ; 116.686,64.046 P5.7@117.263,65.688 ; 116.686,64.046 P5.7@116.94,65.767 ; 116.686,64.046 P5.7@116.686,65.786 ; 116.686,64.046 P5.7@117.263,65.688 ; 116.686,64.046 P5.7@116.94,65.767 ; 116.686,64.046 P5.7@116.686,65.786 ; 116.686,64.046 P5.7@117.263,65.688 ; 116.686,64.046 P5.7@116.94,65.767 ; 116.686,64.046 P5.7@116.686,65.786 ; 116.686,64.046 P5.7@117.263,65.688 ; 116.686,64.046 P5.7@116.94,65.767 ; 116.686,64.046 P5.7@116.686,65.786 ; 116.686,64.046 P5.7@117.263,65.688 ; 116.686,64.046 P5.7@116.94,65.767 ; 116.686,64.046 P5.7@116.686,65.786 ; 116.686,64.046 P5.7@117.263,65.688 ; 116.686,64.046 P5.7@116.94,65.767 ; 116.686,64.046 P5.7@116.686,65.786 ; 116.686,64.046 P5.7@117.263,65.688 ; 116.686,64.046 P5.7@116.94,65.767 ; 116.686,64.046 P5.7@116.686,65.786 ; P5.7@116.686,66.786 116.8,67.8 ; P5.7@116.686,66.786 116.8,67.8 ; P5.7@116.686,66.786 116.8,67.8 ; P5.7@116.686,66.786 116.8,67.8 ; P5.7@116.686,66.786 116.8,67.8 ; P5.7@116.686,66.786 116.8,67.8 ; P5.7@116.686,66.786 116.8,67.8 ; 116.8,67.8 P5.7@117.262,66.89 ; 116.8,67.8 P5.7@116.941,66.789 ; 116.8,67.8 P5.7@117.262,66.89 ; 116.8,67.8 P5.7@116.941,66.789 ; 116.8,67.8 P5.7@117.262,66.89 ; 116.8,67.8 P5.7@116.941,66.789 ; 116.8,67.8 P5.7@117.262,66.89 ; 116.8,67.8 P5.7@116.941,66.789 ; 116.8,67.8 P5.7@117.262,66.89 ; 116.8,67.8 P5.7@116.941,66.789 ; 116.8,67.8 P5.7@117.262,66.89 ; 116.8,67.8 P5.7@116.941,66.789 ; 116.8,67.8 P5.7@117.262,66.89 ; 116.8,67.8 P5.7@116.941,66.789
NetP5_8: P5.8 P9.14 P10.6 R25.1 R25.2 U1.8 | length 664.3
  Bottom Layer w0.33: 40.306,85.9 ccw(c40.306,87.654) P9.14@41.546,86.414 ; 40.789,85.9 cw(c40.789,84.829) P9.14@41.546,85.586 ; 41.103,85.9 ccw(c41.103,86.857) P9.14@41.78,86.18 ; P9.14@42.5,85.9 39.9,85.9 39.4,86.4 39.4,91.3 41,92.9 44.4,92.9 48,89.3 48,69.5 52.116,65.384 R25.1@58.358,65.384 ; R25.1@57.644,64.97 ccw(c56.646,63.972) 56.646,65.384 ccw(c56.646,66.796) R25.1@57.644,65.798 ; R25.2@66,65.3 72.9,65.3 74.3,66.7 74.3,67.8 76.9,70.4 84.9,70.4 87.5,73 89.2,73 89.9,73.7 89.9,76.1 90.4,76.6 96.7,76.6 98.4,74.9 98.4,72.1 97.6,71.3 93.9,71.3 92.3,69.7 92.3,66.491 P10.6@92.215,66.406 ; R25.2@66.408,65.564 ccw(c67.046,66.202) 67.046,65.3 ; R25.2@66.642,64.97 cw(c67.438,64.174) 67.438,65.3 ; R25.2@66.642,65.798 ccw(c67.843,66.999) 67.843,65.3 ; P10.6@91.801,65.492 cw(c90.803,64.494) 92.215,64.494 cw(c93.627,64.494) P10.6@92.629,65.492 ; P10.6@91.801,67.32 ccw(c90.597,68.524) 92.3,68.524 ; P10.6@92.035,67.086 ccw(c91.394,67.727) 92.3,67.727 ; P10.6@92.215,67.006 P10.6@92.215,66.406 ; 92.3,68.113 ccw(c93.422,68.113) P10.6@92.629,67.32 ; U1.8@110.572,82.523 cw(c109.574,81.525) 110.986,81.525 cw(c112.398,81.525) U1.8@111.4,82.523 ; U1.8@110.986,83.687 110.986,81.159 108.8,78.973 108.8,73.3 111.8,70.3 117.2,70.3 119.3,68.2 ; P5.8@118.812,65.372 cw(c117.814,64.374) 119.226,64.374 cw(c120.638,64.374) P5.8@119.64,65.372 ; P5.8@118.85,67.234 ccw(c118.039,68.2) 119.3,68.2 ; P5.8@119.226,66 119.226,62.026 115.6,58.4 96.8,58.4 92.215,62.985 P10.6@92.215,66.406 ; P5.8@119.3,66 119.3,68.2 ; 119.3,68.02 ccw(c120.46,68.02) P5.8@119.64,67.2 ; 40.219,85.9 P9.14@41.895,85.419 ; 40.219,85.9 P9.14@41.829,86.57 ; 40.219,85.9 P9.14@41.956,85.745 ; 40.219,85.9 P9.14@41.927,86.253 ; 40.219,85.9 P9.14@41.96,86 ; 40.219,85.9 P9.14@41.895,85.419 ; 40.219,85.9 P9.14@41.829,86.57 ; 40.219,85.9 P9.14@41.956,85.745 ; 40.219,85.9 P9.14@41.927,86.253 ; 40.219,85.9 P9.14@41.96,86 ; 40.219,85.9 P9.14@41.895,85.419 ; 40.219,85.9 P9.14@41.829,86.57 ; 40.219,85.9 P9.14@41.956,85.745 ; 40.219,85.9 P9.14@41.927,86.253 ; 40.219,85.9 P9.14@41.96,86 ; 40.219,85.9 P9.14@41.895,85.419 ; 40.219,85.9 P9.14@41.829,86.57 ; 40.219,85.9 P9.14@41.956,85.745 ; 40.219,85.9 P9.14@41.927,86.253 ; 40.219,85.9 P9.14@41.96,86 ; 40.219,85.9 P9.14@41.895,85.419 ; 40.219,85.9 P9.14@41.829,86.57 ; 40.219,85.9 P9.14@41.956,85.745 ; 40.219,85.9 P9.14@41.927,86.253 ; 40.219,85.9 P9.14@41.96,86 ; 40.219,85.9 P9.14@41.895,85.419 ; 40.219,85.9 P9.14@41.829,86.57 ; 40.219,85.9 P9.14@41.956,85.745 ; 40.219,85.9 P9.14@41.927,86.253 ; 40.219,85.9 P9.14@41.96,86 ; 40.221,85.9 P9.14@41.895,85.419 ; 40.221,85.9 P9.14@41.829,86.57 ; 40.221,85.9 P9.14@41.956,85.745 ; 40.221,85.9 P9.14@41.927,86.253 ; 40.221,85.9 P9.14@41.96,86 ; 56.318,65.384 R25.1@57.96,64.807 ; 56.318,65.384 R25.1@57.96,65.961 ; 56.318,65.384 R25.1@58.039,65.13 ; 56.318,65.384 R25.1@58.039,65.638 ; 56.318,65.384 R25.1@58.058,65.384 ; 56.318,65.384 R25.1@57.96,64.807 ; 56.318,65.384 R25.1@57.96,65.961 ; 56.318,65.384 R25.1@58.039,65.13 ; 56.318,65.384 R25.1@58.039,65.638 ; 56.318,65.384 R25.1@58.058,65.384 ; 56.318,65.384 R25.1@57.96,64.807 ; 56.318,65.384 R25.1@57.96,65.961 ; 56.318,65.384 R25.1@58.039,65.13 ; 56.318,65.384 R25.1@58.039,65.638 ; 56.318,65.384 R25.1@58.058,65.384 ; 56.318,65.384 R25.1@57.96,64.807 ; 56.318,65.384 R25.1@57.96,65.961 ; 56.318,65.384 R25.1@58.039,65.13 ; 56.318,65.384 R25.1@58.039,65.638 ; 56.318,65.384 R25.1@58.058,65.384 ; 56.318,65.384 R25.1@57.96,64.807 ; 56.318,65.384 R25.1@57.96,65.961 ; 56.318,65.384 R25.1@58.039,65.13 ; 56.318,65.384 R25.1@58.039,65.638 ; 56.318,65.384 R25.1@58.058,65.384 ; 56.318,65.384 R25.1@57.96,64.807 ; 56.318,65.384 R25.1@57.96,65.961 ; 56.318,65.384 R25.1@58.039,65.13 ; 56.318,65.384 R25.1@58.039,65.638 ; 56.318,65.384 R25.1@58.058,65.384 ; 56.318,65.384 R25.1@57.96,64.807 ; 56.318,65.384 R25.1@57.96,65.961 ; 56.318,65.384 R25.1@58.039,65.13 ; 56.318,65.384 R25.1@58.039,65.638 ; 56.318,65.384 R25.1@58.058,65.384 ; R25.2@66.228,65.384 67.971,65.3 ; R25.2@66.228,65.384 67.971,65.3 ; R25.2@66.228,65.384 67.971,65.3 ; R25.2@66.228,65.384 67.971,65.3 ; R25.2@66.228,65.384 67.971,65.3 ; R25.2@66.228,65.384 67.967,65.3 ; R25.2@66.228,65.384 67.971,65.3 ; R25.2@66.234,65.129 67.971,65.3 ; R25.2@66.234,65.129 67.971,65.3 ; R25.2@66.234,65.129 67.971,65.3 ; R25.2@66.234,65.129 67.971,65.3 ; R25.2@66.234,65.129 67.971,65.3 ; R25.2@66.234,65.129 67.967,65.3 ; R25.2@66.234,65.129 67.971,65.3 ; R25.2@66.259,65.637 67.971,65.3 ; R25.2@66.259,65.637 67.971,65.3 ; R25.2@66.259,65.637 67.971,65.3 ; R25.2@66.259,65.637 67.971,65.3 ; R25.2@66.259,65.637 67.971,65.3 ; R25.2@66.259,65.637 67.967,65.3 ; R25.2@66.259,65.637 67.971,65.3 ; R25.2@66.298,64.803 67.971,65.3 ; R25.2@66.298,64.803 67.971,65.3 ; R25.2@66.298,64.803 67.971,65.3 ; R25.2@66.298,64.803 67.971,65.3 ; R25.2@66.298,64.803 67.971,65.3 ; R25.2@66.298,64.803 67.967,65.3 ; R25.2@66.298,64.803 67.971,65.3 ; R25.2@66.354,65.955 67.971,65.3 ; R25.2@66.354,65.955 67.971,65.3 ; R25.2@66.354,65.955 67.971,65.3 ; R25.2@66.354,65.955 67.971,65.3 ; R25.2@66.354,65.955 67.971,65.3 ; R25.2@66.354,65.955 67.967,65.3 ; R25.2@66.354,65.955 67.971,65.3 ; P10.6@91.638,65.808 92.215,64.166 ; P10.6@91.638,65.808 92.215,64.166 ; P10.6@91.638,65.808 92.215,64.166 ; P10.6@91.638,65.808 92.215,64.166 ; P10.6@91.638,65.808 92.215,64.166 ; P10.6@91.638,65.808 92.215,64.166 ; P10.6@91.638,65.808 92.215,64.166 ; P10.6@91.644,67.032 92.3,68.647 ; P10.6@91.644,67.032 92.3,68.647 ; P10.6@91.644,67.032 92.3,68.647 ; P10.6@91.644,67.032 92.3,68.647 ; P10.6@91.644,67.032 92.3,68.647 ; P10.6@91.644,67.032 92.3,68.645 ; P10.6@91.644,67.032 92.3,68.647 ; P10.6@91.961,65.887 92.215,64.166 ; P10.6@91.961,65.887 92.215,64.166 ; P10.6@91.961,65.887 92.215,64.166 ; P10.6@91.961,65.887 92.215,64.166 ; P10.6@91.961,65.887 92.215,64.166 ; P10.6@91.961,65.887 92.215,64.166 ; P10.6@91.961,65.887 92.215,64.166 ; P10.6@91.962,66.937 92.3,68.647 ; P10.6@91.962,66.937 92.3,68.647 ; P10.6@91.962,66.937 92.3,68.647 ; P10.6@91.962,66.937 92.3,68.647 ; P10.6@91.962,66.937 92.3,68.647 ; P10.6@91.962,66.937 92.3,68.645 ; P10.6@91.962,66.937 92.3,68.647 ; 92.215,64.166 P10.6@92.792,65.808 ; 92.215,64.166 P10.6@92.469,65.887 ; 92.215,64.166 P10.6@92.215,65.906 ; 92.215,64.166 P10.6@92.792,65.808 ; 92.215,64.166 P10.6@92.469,65.887 ; 92.215,64.166 P10.6@92.215,65.906 ; 92.215,64.166 P10.6@92.792,65.808 ; 92.215,64.166 P10.6@92.469,65.887 ; 92.215,64.166 P10.6@92.215,65.906 ; 92.215,64.166 P10.6@92.792,65.808 ; 92.215,64.166 P10.6@92.469,65.887 ; 92.215,64.166 P10.6@92.215,65.906 ; 92.215,64.166 P10.6@92.792,65.808 ; 92.215,64.166 P10.6@92.469,65.887 ; 92.215,64.166 P10.6@92.215,65.906 ; 92.215,64.166 P10.6@92.792,65.808 ; 92.215,64.166 P10.6@92.469,65.887 ; 92.215,64.166 P10.6@92.215,65.906 ; 92.215,64.166 P10.6@92.792,65.808 ; 92.215,64.166 P10.6@92.469,65.887 ; 92.215,64.166 P10.6@92.215,65.906 ; P10.6@92.215,66.906 92.3,68.647 ; P10.6@92.215,66.906 92.3,68.647 ; P10.6@92.215,66.906 92.3,68.647 ; P10.6@92.215,66.906 92.3,68.647 ; P10.6@92.215,66.906 92.3,68.647 ; P10.6@92.215,66.906 92.3,68.645 ; P10.6@92.215,66.906 92.3,68.647 ; 92.3,68.645 P10.6@92.796,66.976 ; 92.3,68.645 P10.6@92.47,66.912 ; 92.3,68.647 P10.6@92.796,66.976 ; 92.3,68.647 P10.6@92.47,66.912 ; 92.3,68.647 P10.6@92.796,66.976 ; 92.3,68.647 P10.6@92.47,66.912 ; 92.3,68.647 P10.6@92.796,66.976 ; 92.3,68.647 P10.6@92.47,66.912 ; 92.3,68.647 P10.6@92.796,66.976 ; 92.3,68.647 P10.6@92.47,66.912 ; 92.3,68.647 P10.6@92.796,66.976 ; 92.3,68.647 P10.6@92.47,66.912 ; 92.3,68.647 P10.6@92.796,66.976 ; 92.3,68.647 P10.6@92.47,66.912 ; U1.8@110.409,82.839 110.986,81.197 ; U1.8@110.409,82.839 110.986,81.197 ; U1.8@110.409,82.839 110.986,81.197 ; U1.8@110.409,82.839 110.986,81.197 ; U1.8@110.409,82.839 110.986,81.197 ; U1.8@110.409,82.839 110.986,81.197 ; U1.8@110.409,82.839 110.986,81.197 ; U1.8@110.732,82.918 110.986,81.197 ; U1.8@110.732,82.918 110.986,81.197 ; U1.8@110.732,82.918 110.986,81.197 ; U1.8@110.732,82.918 110.986,81.197 ; U1.8@110.732,82.918 110.986,81.197 ; U1.8@110.732,82.918 110.986,81.197 ; U1.8@110.732,82.918 110.986,81.197 ; 110.986,81.197 U1.8@111.563,82.839 ; 110.986,81.197 U1.8@111.24,82.918 ; 110.986,81.197 U1.8@110.986,82.937 ; 110.986,81.197 U1.8@111.563,82.839 ; 110.986,81.197 U1.8@111.24,82.918 ; 110.986,81.197 U1.8@110.986,82.937 ; 110.986,81.197 U1.8@111.563,82.839 ; 110.986,81.197 U1.8@111.24,82.918 ; 110.986,81.197 U1.8@110.986,82.937 ; 110.986,81.197 U1.8@111.563,82.839 ; 110.986,81.197 U1.8@111.24,82.918 ; 110.986,81.197 U1.8@110.986,82.937 ; 110.986,81.197 U1.8@111.563,82.839 ; 110.986,81.197 U1.8@111.24,82.918 ; 110.986,81.197 U1.8@110.986,82.937 ; 110.986,81.197 U1.8@111.563,82.839 ; 110.986,81.197 U1.8@111.24,82.918 ; 110.986,81.197 U1.8@110.986,82.937 ; 110.986,81.197 U1.8@111.563,82.839 ; 110.986,81.197 U1.8@111.24,82.918 ; 110.986,81.197 U1.8@110.986,82.937 ; P5.8@118.649,65.688 119.226,64.046 ; P5.8@118.649,65.688 119.226,64.046 ; P5.8@118.649,65.688 119.226,64.046 ; P5.8@118.649,65.688 119.226,64.046 ; P5.8@118.649,65.688 119.226,64.046 ; P5.8@118.649,65.688 119.226,64.046 ; P5.8@118.649,65.688 119.226,64.046 ; P5.8@118.661,66.937 119.3,68.2 ; P5.8@118.661,66.937 119.3,68.2 ; P5.8@118.661,66.937 119.3,68.2 ; P5.8@118.661,66.937 119.3,68.2 ; P5.8@118.661,66.937 119.3,68.2 ; P5.8@118.661,66.937 119.3,68.2 ; P5.8@118.661,66.937 119.3,68.2 ; P5.8@118.972,65.767 119.226,64.046 ; P5.8@118.972,65.767 119.226,64.046 ; P5.8@118.972,65.767 119.226,64.046 ; P5.8@118.972,65.767 119.226,64.046 ; P5.8@118.972,65.767 119.226,64.046 ; P5.8@118.972,65.767 119.226,64.046 ; P5.8@118.972,65.767 119.226,64.046 ; P5.8@118.974,66.822 119.3,68.2 ; P5.8@118.974,66.822 119.3,68.2 ; P5.8@118.974,66.822 119.3,68.2 ; P5.8@118.974,66.822 119.3,68.2 ; P5.8@118.974,66.822 119.3,68.2 ; P5.8@118.974,66.822 119.3,68.2 ; P5.8@118.974,66.822 119.3,68.2 ; 119.226,64.046 P5.8@119.803,65.688 ; 119.226,64.046 P5.8@119.48,65.767 ; 119.226,64.046 P5.8@119.226,65.786 ; 119.226,64.046 P5.8@119.803,65.688 ; 119.226,64.046 P5.8@119.48,65.767 ; 119.226,64.046 P5.8@119.226,65.786 ; 119.226,64.046 P5.8@119.803,65.688 ; 119.226,64.046 P5.8@119.48,65.767 ; 119.226,64.046 P5.8@119.226,65.786 ; 119.226,64.046 P5.8@119.803,65.688 ; 119.226,64.046 P5.8@119.48,65.767 ; 119.226,64.046 P5.8@119.226,65.786 ; 119.226,64.046 P5.8@119.803,65.688 ; 119.226,64.046 P5.8@119.48,65.767 ; 119.226,64.046 P5.8@119.226,65.786 ; 119.226,64.046 P5.8@119.803,65.688 ; 119.226,64.046 P5.8@119.48,65.767 ; 119.226,64.046 P5.8@119.226,65.786 ; 119.226,64.046 P5.8@119.803,65.688 ; 119.226,64.046 P5.8@119.48,65.767 ; 119.226,64.046 P5.8@119.226,65.786 ; P5.8@119.226,66.786 119.3,68.2 ; P5.8@119.226,66.786 119.3,68.2 ; P5.8@119.226,66.786 119.3,68.2 ; P5.8@119.226,66.786 119.3,68.2 ; P5.8@119.226,66.786 119.3,68.2 ; P5.8@119.226,66.786 119.3,68.2 ; P5.8@119.226,66.786 119.3,68.2 ; 119.3,68.2 P5.8@119.804,66.877 ; 119.3,68.2 P5.8@119.481,66.796 ; 119.3,68.2 P5.8@119.804,66.877 ; 119.3,68.2 P5.8@119.481,66.796 ; 119.3,68.2 P5.8@119.804,66.877 ; 119.3,68.2 P5.8@119.481,66.796 ; 119.3,68.2 P5.8@119.804,66.877 ; 119.3,68.2 P5.8@119.481,66.796 ; 119.3,68.2 P5.8@119.804,66.877 ; 119.3,68.2 P5.8@119.481,66.796 ; 119.3,68.2 P5.8@119.804,66.877 ; 119.3,68.2 P5.8@119.481,66.796 ; 119.3,68.2 P5.8@119.804,66.877 ; 119.3,68.2 P5.8@119.481,66.796